# Altium PCB tc_tp6_ej3 probando.PcbDoc
Units mm, origin at the board's own origin, x right, y up, seen from the top; angles counter-clockwise.
Board outline 100 x 100 mm, 2 copper layers (Top Layer, Bottom Layer); 34 components, 26 nets, 92 pads, 3 vias.
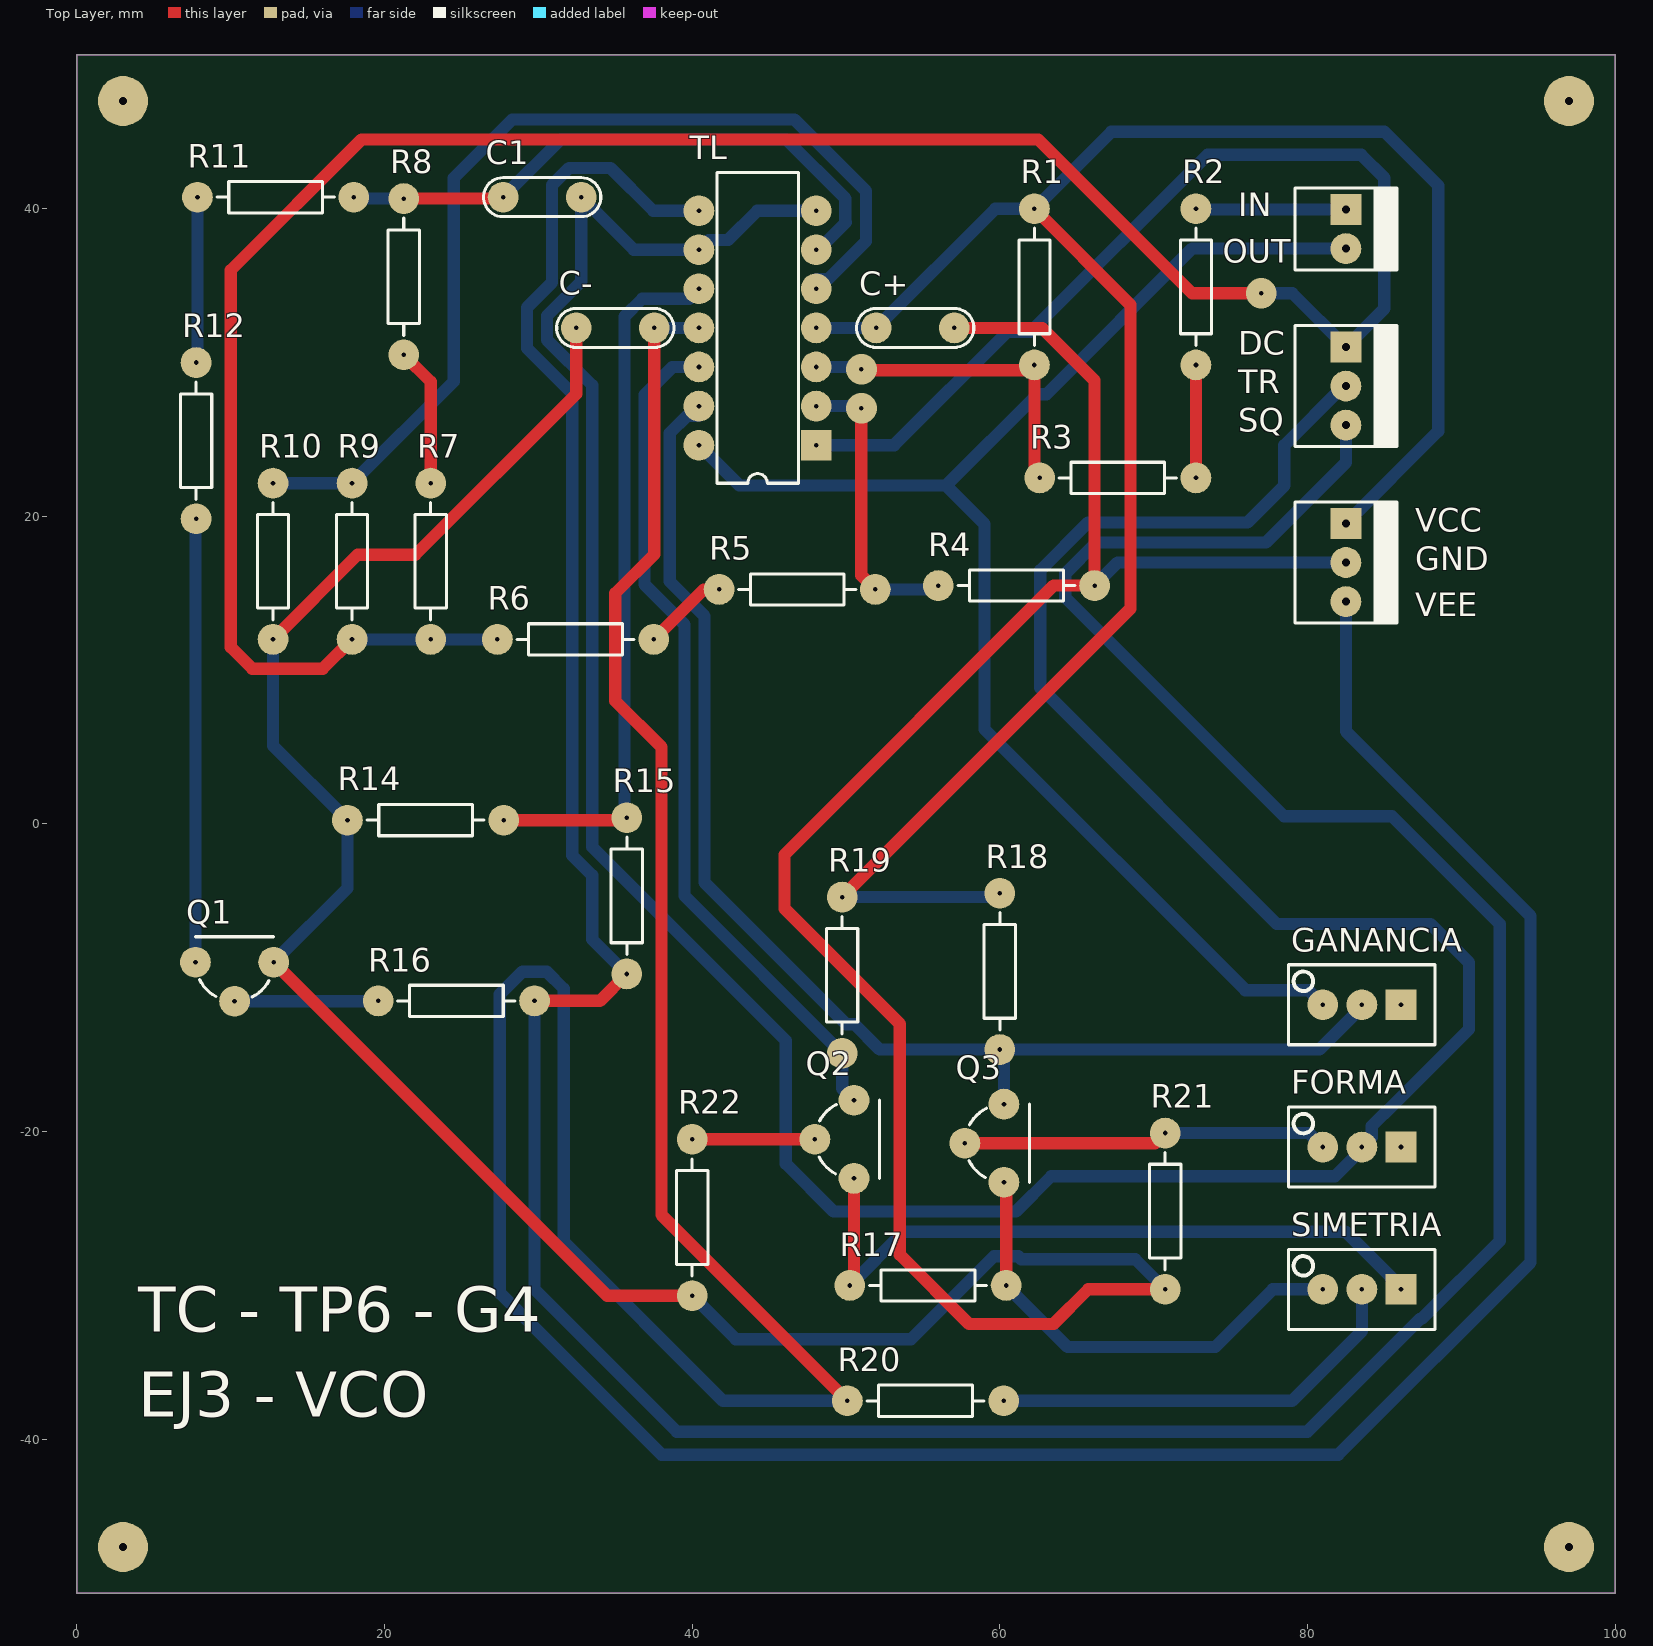
[diagram p0: Top Layer view]
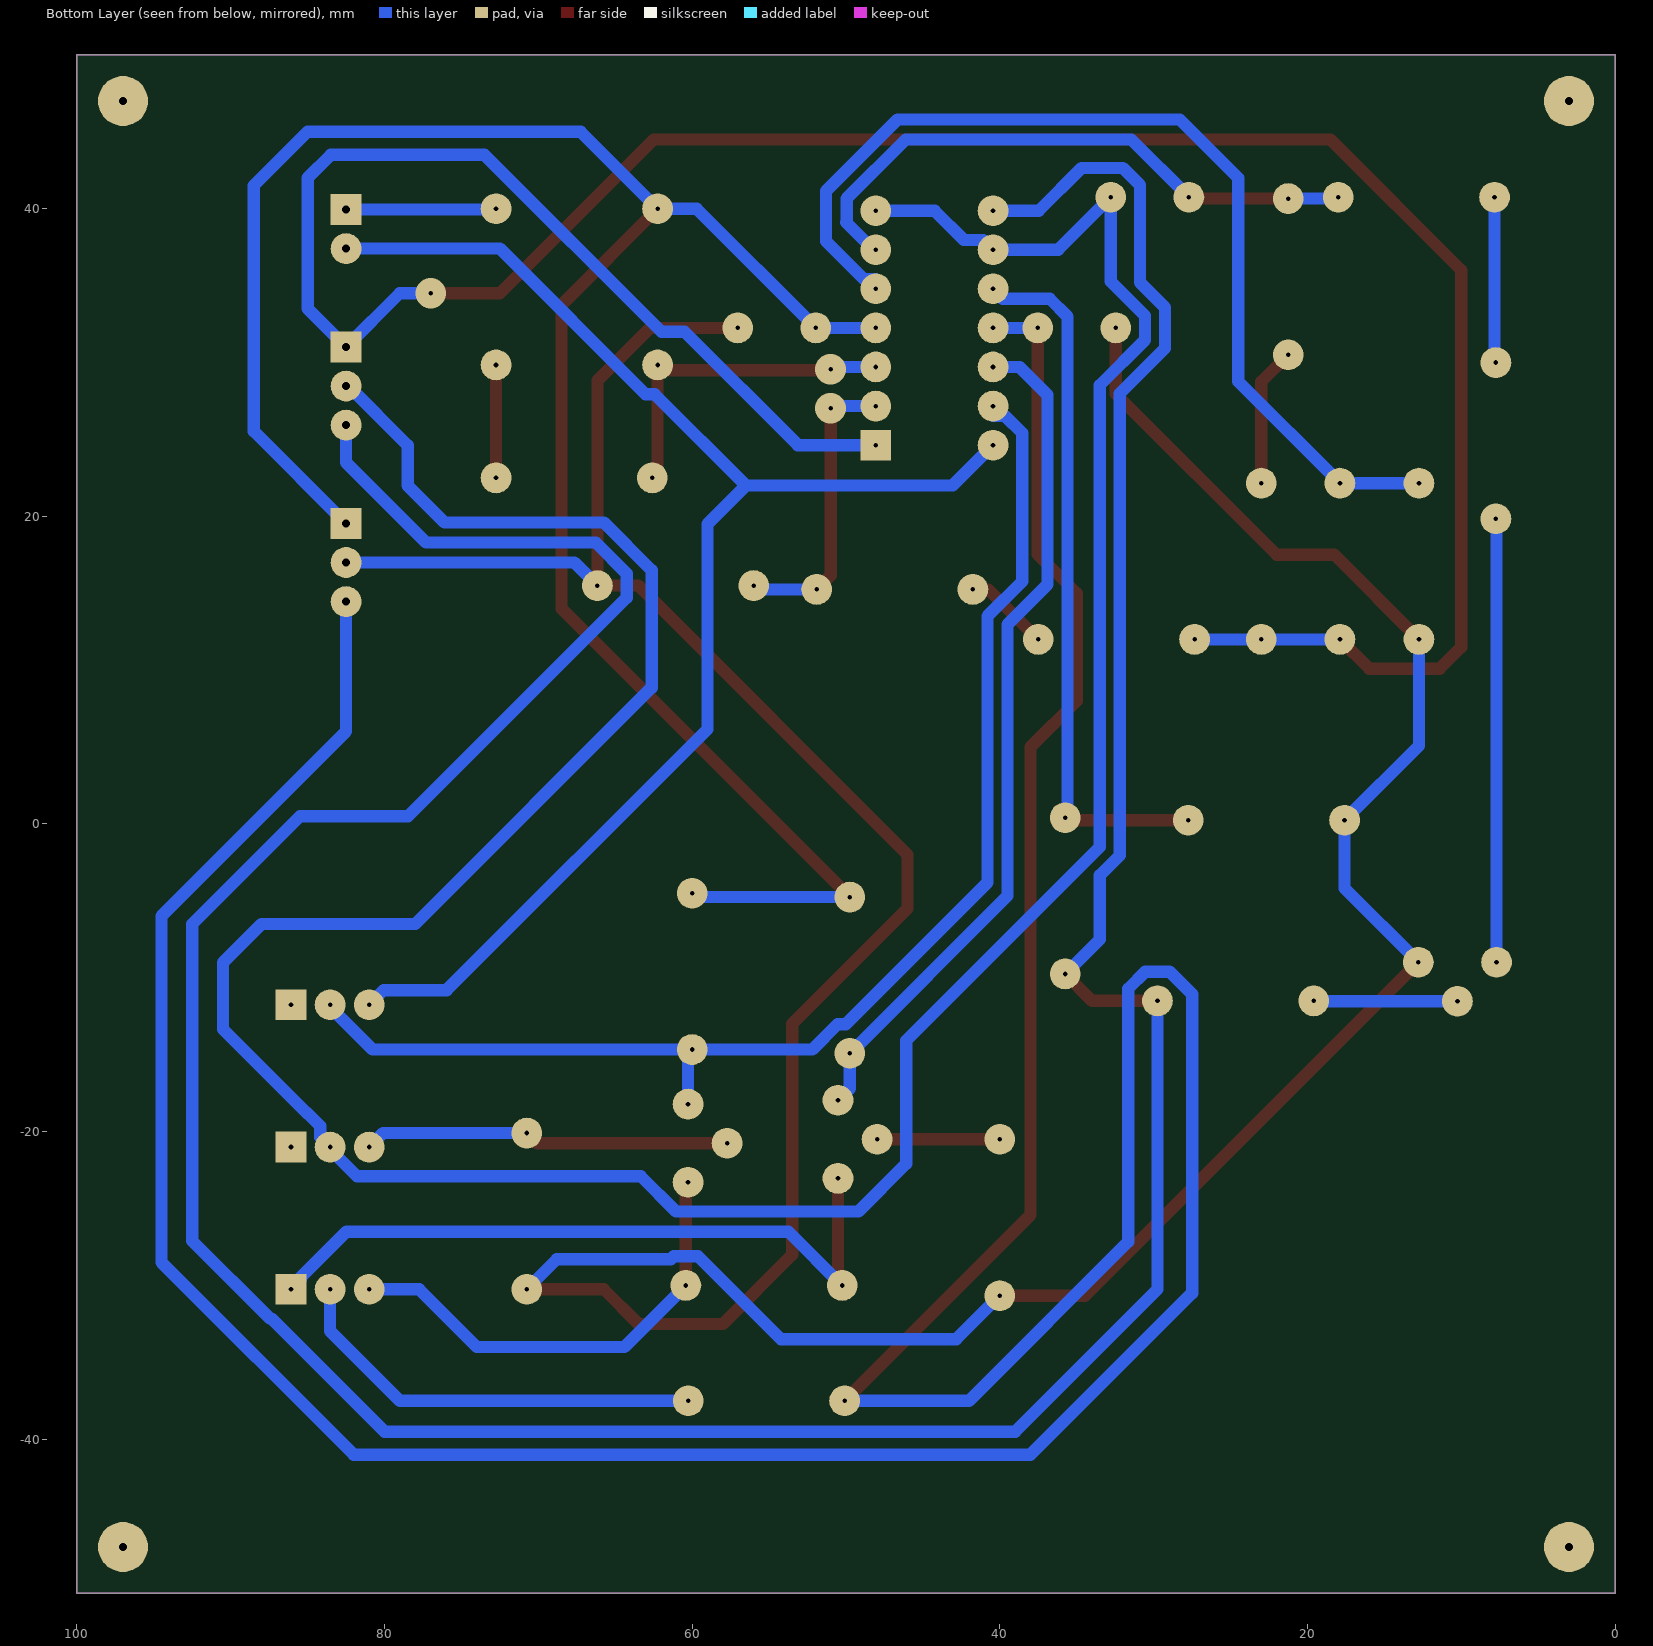
[diagram p1: Bottom Layer view, seen from below]
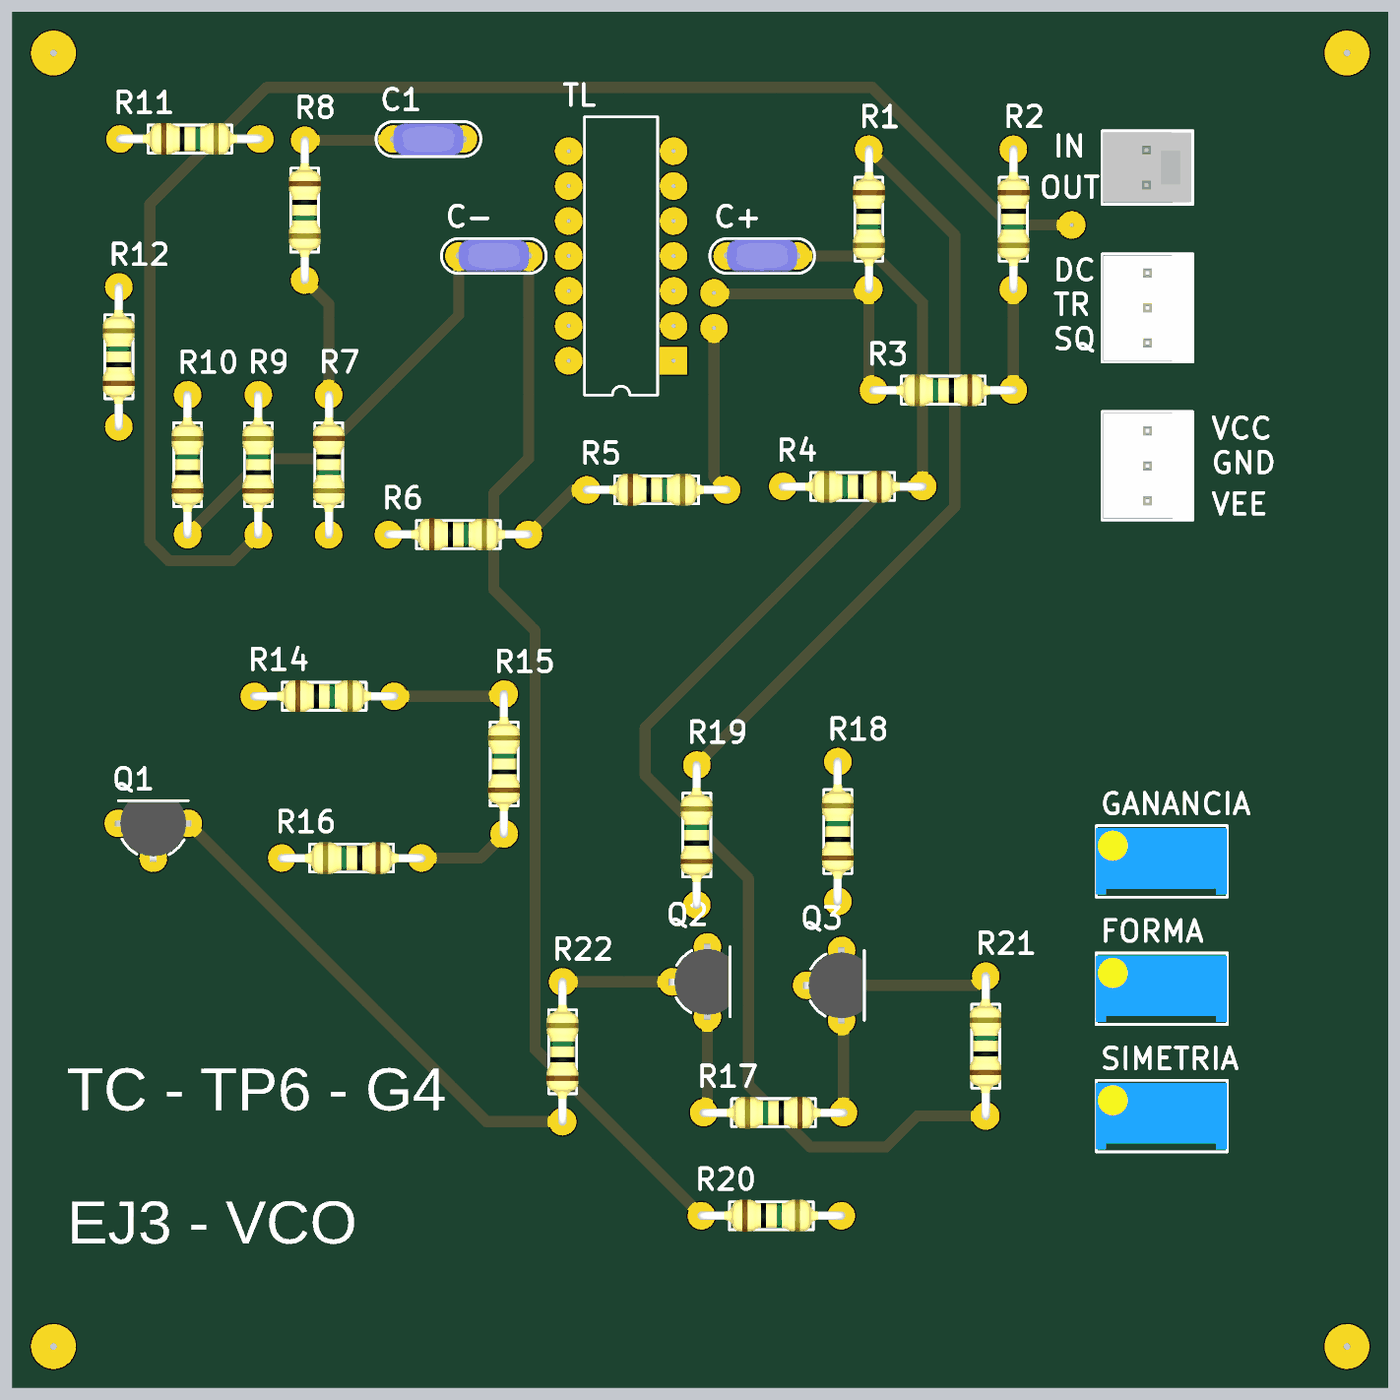
[diagram p2: 3D render of the assembled board from above, using the file's embedded part models]

## Layer stack, top to bottom
Top Solder: solder mask 0.0102, Solder Resist, Dk 3.5
Top Layer: signal copper 0.0356
Dielectric 1: dielectric 0.32, FR-4, Dk 4.8
Bottom Layer: signal copper 0.0356
Bottom Solder: solder mask 0.0102, Solder Resist, Dk 3.5

## Board outline
0,50 100,50 100,-50 0,-50

## Design rules (kind name [scope] priority, off if disabled: settings)
Clearance [All] p1: gap=0.5 ignorepadtopadclearanceinfootprint=FALSE
PolygonConnect [All] p1: connectstyle=Relief reliefconductorwidth=0.254 reliefentries=4 polygonreliefangle="90 Angle" airgapwidth=0.254
RoutingVias [All] p1: holewidth=0.3 width=2 viastyle="Through Hole" minholewidth=0.3 minwidth=2 maxholewidth=0.3 maxwidth=2
SolderMaskExpansion [All] p1: expansion=0.102
Width [All] p1: maxlimit=0.8 minlimit=0.8 preferedwidth=0.8
30 further rules are at their usual default settings.

## Classes and differential pairs
component class tc_tp6_ej3: C1 C+ C- DC FORMA GANANCIA IN Q1 Q2 Q3 R1 R2 R3 R4 R5 R6 R7 R8 R9 R11 R12 R14 R15 R16 R17 R18 R19 R20 R21 R22 TL VCC

## Components (designator, comment, footprint, x,y, rotation, side; value= is the part's Value field where it differs from the comment)
C1 "10n" CAP200 30.25,40.75 r0 top
C+ "100n" CAP200 54.5,32.25 r180 top
C- "100n" CAP200 35,32.25 r180 top
DC "MOLEX3" MOLEX3 82.5,31.014 r270 top (schematic designator ETAPAS)
FORMA "PRESET" "PRESET V" 83.54,-21 r180 top (schematic designator PRE1)
GANANCIA "PRESET" "PRESET V" 83.54,-11.75 r180 top (schematic designator PRE3)
IN "MOLEX2" MOLEX2 82.5,39.947 r270 top (schematic designator INOUT)
Q1 "2N2222" TO92 10.25,-10.25 r0 top
Q2 "2N2222" TO92 49.25,-20.5 r270 top
Q3 "2N2222" TO92 59,-20.75 r270 top
R1 "33k" RES400 62.25,40 r270 top
R2 "22R" RES400 72.75,40 r270 top
R3 "1k2" RES400 72.75,22.5 r180 top
R4 "15k" RES400 66.16,15.5 r180 top
R5 "12k" RES400 41.75,15.25 r0 top
R6 "1k" RES400 27.34,12 r0 top
R7 "1k" RES400 23,22.16 r270 top
R8 "1k5" RES400 21.25,40.66 r270 top
R9 "10k" RES400 17.888,12 r90 top
R10 "10k" RES400 12.75,12 r90 top
R11 "1k2" RES400 7.84,40.75 r0 top
R12 "47R" RES400 7.75,19.84 r90 top
R14 "1k" RES400 17.59,0.25 r0 top
R15 "2k2" RES400 35.75,-9.75 r90 top
R16 "1k" RES400 29.75,-11.5 r180 top
R17 "390R" RES400 60.41,-30 r180 top
R18 "10k" RES400 60,-14.66 r90 top
R19 "10k" RES400 49.75,-14.91 r90 top
R20 "18k" RES400 50.09,-37.5 r0 top
R21 "2k2" RES400 70.75,-30.25 r90 top
R22 "2k2" RES400 40,-30.66 r90 top
SIMETRIA "PRESET" "PRESET V" 83.54,-30.25 r180 top (schematic designator PRE2)
TL "TL074CN" DIP14 44.25,32.25 r90 top
VCC "MOLEX3" MOLEX3 82.5,19.54 r270 top (schematic designator ALIMENTACION)

## Footprints (in the part's own frame and the unit in brackets; to place one, negate y for a bottom-side part, rotate by r counter-clockwise, add the part's x,y. Pads: shape width x height; smd on the part's side, far side on the other; paste and mask are expansions set on the pad)
CAP200 [mm]
  round 2 hole 0.3: 1(-2.54,0) 2(2.54,0)
  silkscreen extent -3.81,-1.27 3.81,1.27, body extent -2.79,-1.17 2.79,1.12, height 6.24
DIP14 [mm] "DIP; 14 Leads; Row Spacing 7.62 mm; Pitch 2.54 mm"
  rect 2x2 hole 0.3: 1(-7.62,-3.81)
  round 2 hole 0.3: 2(-5.08,-3.81) 3(-2.54,-3.81) 4(0,-3.81) 5(2.54,-3.81) 6(5.08,-3.81) 7(7.62,-3.81) 8(7.62,3.81) 9(5.08,3.81) 10(2.54,3.81) 11(0,3.81) 12(-2.54,3.81) 13(-5.08,3.81) 14(-7.62,3.81)
  silkscreen extent -10.1,-2.65 10.1,2.65
MOLEX2 [mm]
  rect 2x2 hole 0.5: 1(0,0)
  round 2 hole 0.5: 2(2.54,0)
  silkscreen extent -1.4,-3.3 3.94,3.3, body extent -1.27,-3.18 3.81,3.18, height 10.74
MOLEX3 [mm]
  rect 2x2 hole 0.5: 1(0,0)
  round 2 hole 0.5: 2(2.54,0) 3(5.08,0)
  silkscreen extent -1.4,-3.3 6.48,3.3, body extent -1.27,-3.18 6.35,3.18, height 10.74
"PRESET V" [mm]
  rect 2x2 hole 0.3: 1(-2.54,0)
  round 2 hole 0.3: 2(0,0) 3(2.54,0)
  silkscreen extent -4.76,-2.6 4.76,2.6, body extent -4.7,-2.42 4.83,2.42, height 11.55
RES400 [mm]
  round 2 hole 0.3: 1(0,0) 2(10.16,0)
  silkscreen extent 1.27,-1.02 8.89,1.02, body extent -0.3,-1.14 10.46,1.17, height 2.43
TO92 [mm]
  round 2 hole 0.3: 1(0,-1.27) 2(2.54,1.27) 3(-2.54,1.27)
  silkscreen extent -2.54,-1 2.54,2.92, body extent -2.79,-1.55 2.79,2.79, height 8

## Part data
C1 C+ C-: library part CAP
R1 R2 R3 R4 R5 R6 R7 R8 R9 R10 R11 R12 R14 R15 R16 R17 R18 R19 R20 R21 R22: library part RES
TL: "Low-Noise J-FET Quad Operational Amplifier", ComponentLink1Description="Manufacturer Link", ComponentLink1URL=http://www.st.com/, ComponentLink2Description=Datasheet, ComponentLink2URL=http://www.st.com/stonline/products/literature/ds/2297/tl074.pdf, DatasheetVersion=Dec-1998, LatestRevisionDate=06-Jun-2005, LatestRevisionNote="Stylized 3D Model Added.", PackageDescription="DIP; 14 Leads; Row Spacing 7.62 mm; Pitch 2.54 mm", PackageReference=DIP14, PackageVersion=Jan-1997, Published=24-Aug-2001, Publisher="Altium Limited"

## Free pads (board coordinates)
  round 3.25 hole 0.5: 1(3,-47) 1(3,47) 1(97,-47) 1(97,47)

## Via types
v1: diameter 2, hole 0.3, Top Layer to Bottom Layer, 3 vias

## Nets (pads, with @x,y where several pads share a name; then routed paths per layer and width w, separated by ;. In a path a pad name is that pad's centre, name@x,y a point inside that pad or via, vN(x,y) a via of type N, cw(c..) or ccw(c..) an arc to the next point about the centre after c; other vN are vias at no path point)
DC: DC.1 R6.1 R7.2 R9.1 TL.1 | length 182.2
  Top Layer w0.8: R9.1 15.988,10.1 11.4,10.1 10,11.5 10,36 18.5,44.5 62.5,44.5 72.5,34.5 v1(77,34.5)
  Bottom Layer w0.8: R9.1 R7.2 R6.1 ; TL.1 53.13,24.63 60.5,32 62,32 73.5,43.5 83.5,43.5 85,42 85,33.514 DC.1 79.014,34.5 v1(77,34.5)
GND: C+.1 C-.2 Q1.2 R4.1 R10.1 R14.1 R21.1 R22.1 VCC.2 | length 244.2
  Top Layer w0.8: R10.1 18.25,17.5 22,17.5 32.46,27.96 C-.2 ; Q1.2 34.47,-30.66 R22.1 ; C+.1 62.75,32.25 66.16,28.84 R4.1 63.5,15.5 46,-2 46,-5.5 53.5,-13 53.5,-28 58,-32.5 63.5,-32.5 65.75,-30.25 R21.1
  Bottom Layer w0.8: R10.1 12.75,5.09 R14.1 17.59,-4.18 Q1.2 ; R22.1 42.84,-33.5 54.223,-33.5 59.623,-28.1 61.197,-28.1 61.397,-28.3 68.8,-28.3 R21.1 ; R4.1 67.66,17 VCC.2
IN: IN.1 R2.1 | length 9.8
  Bottom Layer w0.8: R2.1 72.803,39.947 IN.1
NetC1_1: C1.1 R8.1 R11.2 TL.6 | length 39.4
  Top Layer w0.8: R8.1 27.62,40.66 C1.1
  Bottom Layer w0.8: R11.2 18.09,40.66 R8.1 ; C1.1 31.46,44.5 46.117,44.5 49.96,40.657 49.96,39.163 50,39.123 48.207,37.33 TL.6
NetPRE1_3: FORMA.3 Q3.1 R21.2 | length 23.9
  Top Layer w0.8: Q3.1 70.09,-20.75 R21.2
  Bottom Layer w0.8: R21.2 80.09,-20.09 FORMA.3
NetPRE2_1: Q2.2 R17.2 SIMETRIA.1 | length 46.9
  Top Layer w0.8: R17.2 50.52,-29.73 Q2.2
  Bottom Layer w0.8: R17.2 53.75,-26.5 82.477,-26.5 86.08,-30.103 SIMETRIA.1 SIMETRIA.1@85.44,-29.61
NetPRE2_2: R20.2 SIMETRIA.2 | length 27.9
  Bottom Layer w0.8: R20.2 79,-37.5 83.54,-32.96 SIMETRIA.2
NetPRE2_3: Q3.2 R17.1 SIMETRIA.3 | length 30.6
  Top Layer w0.8: Q3.2 60.41,-23.43 R17.1
  Bottom Layer w0.8: R17.1 64.41,-34 74,-34 77.75,-30.25 SIMETRIA.3
NetQ1_1: Q1.1 R16.2 | length 9.3
  Bottom Layer w0.8: Q1.1 19.57,-11.52 R16.2
NetQ1_3: Q1.3 R12.1 | length 28.8
  Bottom Layer w0.8: Q1.3 7.71,19.8 R12.1
NetQ2_1: Q2.1 R22.2 | length 8
  Top Layer w0.8: R22.2 Q2.1
NetR1_2: R1.2 R3.2 TL.3 | length 22
  Top Layer w0.8: v1@51.21,29.5 61.59,29.5 62.09,30 R1.2 62.25,22.84 R3.2
  Bottom Layer w0.8: TL.3 50.71,29.71 50.92,29.5 v1@51.21,29.5
  other v1: 51,29.566
NetR2_2: R2.2 R3.1 | length 7.3
  Top Layer w0.8: R3.1 R2.2
NetR4_2: R4.2 R5.2 TL.2 | length 19.3
  Top Layer w0.8: v1@51,27 51,16.16 R5.2
  Bottom Layer w0.8: TL.2 50.83,27.17 v1@51,27 ; R5.2 55.75,15.25 R4.2
  other v1: 51,27.026
NetR5_1: R5.1 R6.2 | length 5.6
  Top Layer w0.8: R6.2 40.75,15.25 R5.1
NetR7_1: R7.1 R8.2 | length 9.1
  Top Layer w0.8: R8.2 23,28.75 R7.1
NetR9_2: R9.2 R10.2 TL.5 | length 66.2
  Bottom Layer w0.8: R10.2 R9.2 24.5,28.772 24.5,42 28.3,45.8 46.655,45.8 51.3,41.155 51.3,37.883 48.847,35.43 48.06,35.43 TL.5
NetR11_1: R11.1 R12.2 | length 10.8
  Bottom Layer w0.8: R12.2 7.84,30.09 R11.1
NetR14_2: R14.2 R15.2 TL.10 | length 46.4
  Top Layer w0.8: R14.2 35.59,0.25 R15.2
  Bottom Layer w0.8: R15.2 35.6,0.41 35.6,32.997 36.753,34.15 39.8,34.15 TL.10
OUT: GANANCIA.3 IN.2 TL.14 | length 95.8
  Bottom Layer w0.8: TL.14 43.07,22 56.5,22 ; GANANCIA.3 80.05,-10.8 75.962,-10.8 59,6.162 59,19.5 56.5,22 ; IN.2 72.504,37.407 63.037,27.94 62.44,27.94 56.5,22
S1: GANANCIA.2 Q3.3 R18.1 TL.13 | length 85.3
  Bottom Layer w0.8: TL.13 40.44,26.53 39.653,26.53 38.54,25.417 38.54,15.773 40.8,13.513 40.8,-3.8 50.01,-13.01 50.537,-13.01 52.187,-14.66 R18.1 ; Q3.3 60.27,-14.93 R18.1 ; GANANCIA.2 83.54,-11.897 80.777,-14.66 R18.1
S2: Q2.3 R19.1 TL.12 | length 55.8
  Bottom Layer w0.8: TL.12 38.71,29.71 36.9,27.9 36.9,15.575 39.5,12.975 39.5,-4.66 R19.1 49.75,-17.19 Q2.3
SQ: DC.3 R15.1 R16.1 TL.8 | length 246
  Top Layer w0.8: R16.1 34,-11.5 R15.1
  Bottom Layer w0.8: R16.1 29.75,-30.25 39,-39.5 80,-39.5 87.35,-32.15 87.453,-32.15 92.5,-27.103 92.5,-6.5 85.5,0.5 78.473,0.5 64.26,14.713 64.26,16.287 66.273,18.3 77.3,18.3 82.5,23.5 DC.3 DC.3@82.647,25.934 ; R15.1 33.5,-7.5 33.5,-3.338 32.2,-2.038 32.2,27.985 29.26,30.925 29.26,33.575 30.89,35.205 30.89,41.537 32.003,42.65 34.69,42.65 37.47,39.87 TL.8
TR: C1.2 DC.2 FORMA.2 TL.7 TL.9 | length 212.7
  Bottom Layer w0.8: TL.7 44.24,39.87 42.34,37.97 41.08,37.97 TL.9 36.21,37.33 C1.2 32.79,35.267 30.56,33.037 30.56,31.463 33.5,28.523 33.5,-1.5 46.08,-14.08 46.08,-22.08 49.19,-25.19 61.057,-25.19 63.347,-22.9 81.787,-22.9 83.54,-21.147 FORMA.2 84.18,-20.36 84.18,-19.627 85.007,-18.8 85.038,-18.8 90.5,-13.338 90.5,-9 88,-6.5 78,-6.5 62.635,8.865 62.635,16.5 65.735,19.6 76.1,19.6 78.5,22 78.5,24.621 82.353,28.474 DC.2
VCC: C+.2 R1.1 R18.2 R19.2 TL.4 VCC.1 | length 137.1
  Top Layer w0.8: R19.2 68.5,14 68.5,33.75 R1.1
  Bottom Layer w0.8: TL.4 C+.2 59.71,40 R1.1 67.25,45 85,45 88.5,41.5 88.5,25.54 VCC.1 ; R19.2 59.75,-4.75 R18.2
VEE: C-.1 R20.1 TL.11 VCC.3 | length 268.2
  Top Layer w0.8: C-.1 37.54,17.54 35,15 35,8 38,5 38,-25.41 R20.1
  Bottom Layer w0.8: C-.1 TL.11 ; R20.1 42,-37.5 31.65,-27.15 31.65,-10.713 30.537,-9.6 28.963,-9.6 27.5,-11.063 27.5,-30.5 38,-41 82,-41 94.5,-28.5 94.5,-5.977 82.5,6.023 VCC.3
pads on no net: FORMA.1 GANANCIA.1

## Keep-outs
Keep-Out Layer:
  the board outline again, w0.1

## Silkscreen, mask and mechanical layers (free items; w line width, h text height)
Top Overlay:
  text "OUT" at 74.5,36.5 h1.52
  text "TR" at 75.5,28 h1.52
  text "SQ" at 75.5,25.5 h1.52
  text "GND" at 87,16.5 h1.52
  text "VEE" at 87,13.5 h1.52
  text "TC - TP6 - G4" at 4,-34 h5
  text "EJ3 - VCO" at 4,-39.5 h5